# EAGLE board Longboard (EAGLE 9.1.3), part 1 of 2
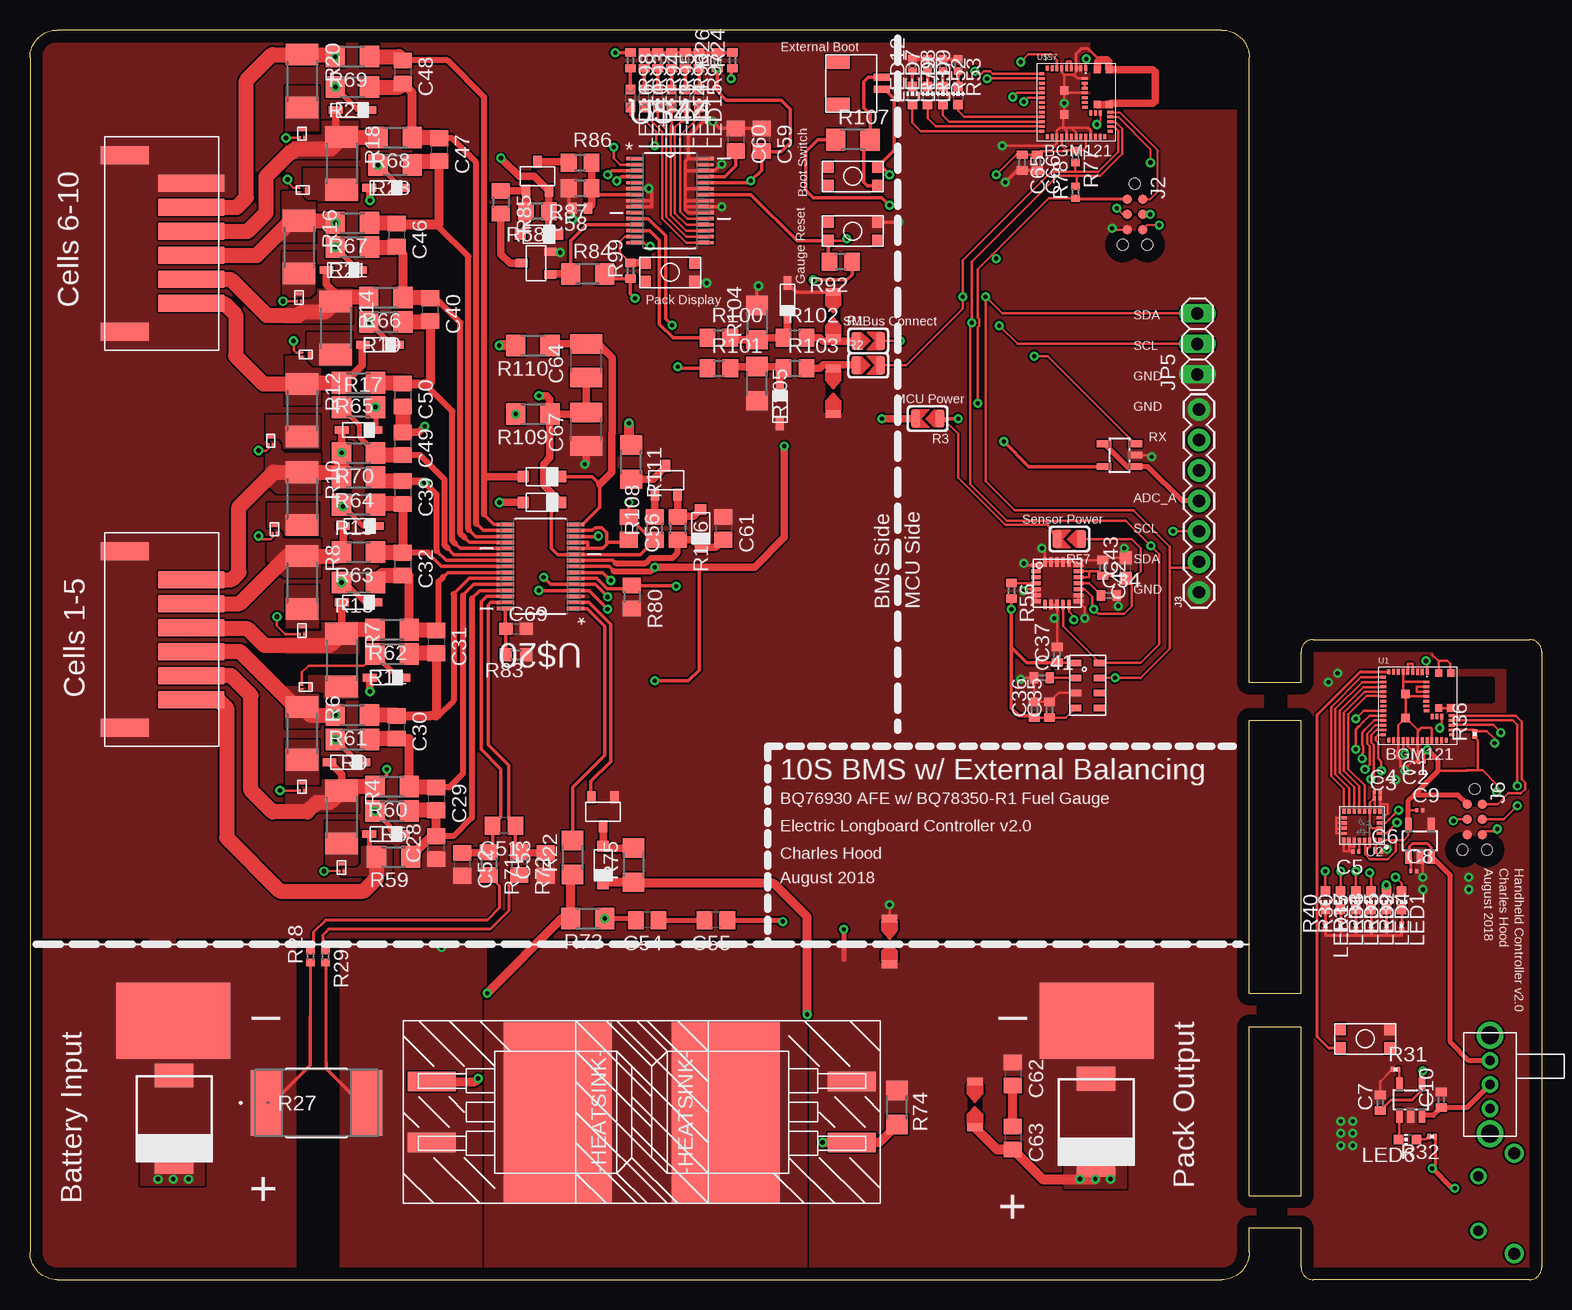
[diagram p0: board, top side]
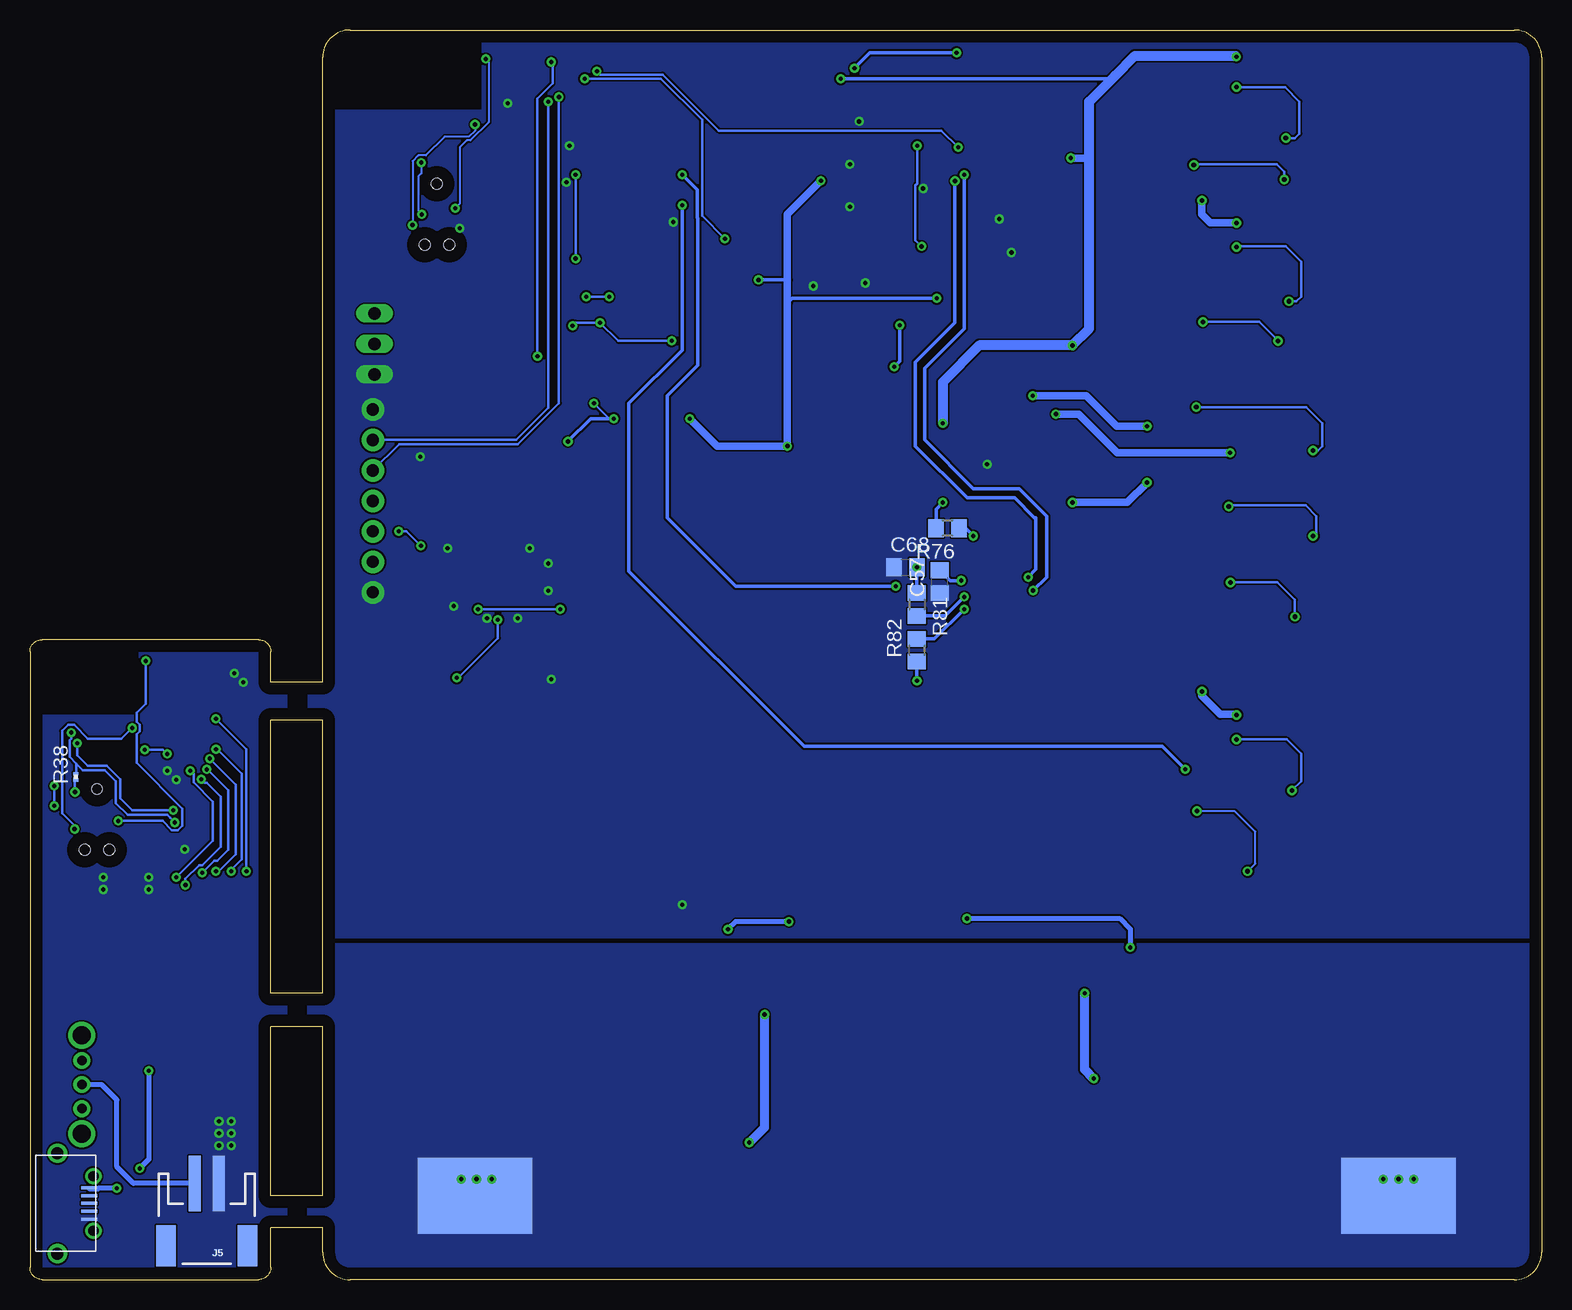
[diagram p1: board, bottom side, seen from below]

Size 125.98 x 104.14 mm. Coordinates in mm from the lower left corner, seen from the top.
Outline: 2.29,0 99.31,0 arc90 101.6,2.29 101.6,4.32 105.92,4.32 105.92,1.02 arc90 106.93,0 124.97,0 arc90 125.98,1.02 125.98,52.32 arc90 124.97,53.34 106.93,53.34 arc90 105.92,52.32 105.92,49.78 101.6,49.78 101.6,101.85 arc90 99.31,104.14 2.29,104.14 arc90 0,101.85 0,2.29 arc90 2.29,0
Outline: 101.6,6.99 101.6,21.08 105.92,21.08 105.92,6.99 101.6,6.99
Outline: 101.6,23.88 101.6,46.61 105.92,46.61 105.92,23.88 101.6,23.88
Copper layers (1*16): Top 0.035mm / dielectric 1.5mm / Bottom 0.035mm
Design rules "default": minimum track width 6mil, minimum drill 0.35mm, track to track 6mil, track to pad 6mil, pad to pad 6mil, via to via 6mil, smd to smd 6mil, copper to edge 40mil, drill to drill 6mil, minimum pad ring 10mil, minimum via ring 8mil, stop-mask expansion 4mil, vias tented up to drill 0mil, thermal gap 10mil
Net classes: 0 default: width 0.152 mm, drill 0.305 mm, clearance 0.152 mm; 1 power: width 0.203 mm, drill 0.305 mm, clearance 0.152 mm
tRestrict: area 88.4,97.5 to 101.6,105.4; area 113.3,45.2 to 117.3,50.3
bRestrict: area 88.4,97.5 to 102.4,105.2

## Footprints (pad centres in the part's own frame; a part is rotated, then mirrored left to right if it is on the bottom)
C0201 = smd 0.25 x 0.35: 1 -0.25,0; 2 0.25,0
C0402 = smd 0.7 x 0.9: 1 -0.65,0; 2 0.65,0
C0805 = smd 1.3 x 1.5: 1 -0.95,0; 2 0.95,0
C0603 = smd 1.1 x 1: 1 -0.85,0; 2 0.85,0
C1210 = smd 1.6 x 2.7: 1 -1.4,0; 2 1.4,0
JST_2PIN_SH = smd 0.6 x 1.35: 1 -0.5,2.135; 2 0.5,2.135 | smd 1.2 x 2: A1 -1.8,-1.54; A2 1.8,-1.54
TC2030-MCP-NL = smd 0.787 x 0.787: 1 1.27,-0.635; 2 1.27,0.635; 3 2.54,-0.635; 4 2.54,0.635; 5 3.81,-0.635; 6 3.81,0.635 | hole 0.889: 0,0; 5.08,-1.016; 5.08,1.016
1X07 = drill 1.016 pad 1.88: 1 0,0; 2 2.54,0; 3 5.08,0; 4 7.62,0; 5 10.16,0; 6 12.7,0; 7 15.24,0
MOLEX_USB = smd 0.25 x 1.35: P$1 -1.3,2.65; P$2 -0.65,2.65; P$3 0,2.65; P$4 0.65,2.65; P$5 1.3,2.65 | drill 0.85 pad 1.206: P$6 -2.276,3; P$7 2.276,3 | drill 1 pad 1.6: P$8 -4.175,0; P$9 4.175,0
JST-2-SMD = smd 1 x 4.6: 1 -1,-3.7; 2 1,-3.7 | smd 1.6 x 3.4: NC1 -3.4,1.5; NC2 3.4,1.5
1X03 = drill 1.016 long: 1 -2.54,0; 2 0,0; 3 2.54,0
CHIP-LED0603 = smd 0.8 x 0.8: A 0,-0.75; C 0,0.75
CHIPLED_0603 = smd 0.8 x 0.8: A 0,-0.75; C 0,0.75
3-XFDFN = smd 0.5 x 0.25: P$1 0,0.325 | smd 0.15 x 0.25: P$2 -0.175,-0.325; P$3 0.175,-0.325
SOLDERJUMPER_ARROW_NOPASTE = smd 0.762 x 1.524: 1 -1.016,0; 2 1.016,0
R2010 = smd 1.8 x 2.7: 1 -2.2,0; 2 2.2,0
R1206 = smd 1.6 x 1.803: 1 -1.422,0; 2 1.422,0
R0402 = smd 0.7 x 0.9: 1 -0.65,0; 2 0.65,0
W-3921 = smd 2.642 x 5.461: 1 -4.166,0; 2 4.166,0
R0402' = smd 0.6 x 0.7: 1 -0.5,0; 2 0.5,0
R0201 = smd 0.28 x 0.43: 1 -0.255,0; 2 0.255,0
R0805 = smd 1.3 x 1.5: 1 -0.95,0; 2 0.95,0
R0603 = smd 1 x 1.1: 1 -0.85,0; 2 0.85,0
KMR731NG = smd 0.9 x 1: P$1 -2.05,0.8; P$2 2.05,0.8; P$3 2.05,-0.8; P$4 -2.05,-0.8
BGM121_PAC = smd 0.245 x 0.5: P$1 3.65,5.7; P$2 3.25,5.7; P$3 2.85,5.7; P$4 2.45,5.7; P$5 2.05,5.7; P$6 1.65,5.7; P$7 1.25,5.7; P$8 0.85,5.7; P$24 0.85,0; P$25 1.25,0; P$26 1.65,0; P$27 2.05,0; P$28 2.45,0; P$29 2.85,0; P$30 3.25,0; P$31 3.65,0; P$32 4.05,0; P$33 4.45,0; P$34 4.85,0 | smd 0.245 x 0.425: P$9 0.45,5.7; P$23 0.45,0; P$35 5.25,0 | smd 0.425 x 0.245: P$10 0,5.25; P$22 0,0.45; P$36 5.7,0.45 | smd 0.5 x 0.245: P$11 0,4.85; P$12 0,4.45; P$13 0,4.05; P$14 0,3.65; P$15 0,3.25; P$16 0,2.85; P$17 0,2.45; P$18 0,2.05; P$19 0,1.65; P$20 0,1.25; P$21 0,0.85; P$37 5.7,0.85; P$38 5.7,1.25; P$39 5.7,1.65; P$40 5.7,2.05; P$45 3.585,2.85; P$46 3.585,3.25; P$47 3.585,3.65; P$48 3.585,4.05; P$49 3.585,4.45; P$50 3.585,4.85 | smd 0.245 x 0.45: P$41 4.865,1.98; P$42 4.465,1.98; P$43 4.065,1.98 | smd 0.45 x 0.245: P$44 3.585,2.45 | smd 0.67 x 0.67: P$51 1.85,3.85; P$52 1.85,1.85 | smd 0.6 x 0.6: P$53 5.615,5.6; P$54 4.615,5.6; P$55 4.615,2.68; P$56 5.615,2.68
LGA24-8X4 = smd 0.27 x 0.45: 1 -1.505,1.225; 6 -1.505,-1.225; 7 -1.075,-1.225; 8 -0.645,-1.225; 9 -0.215,-1.225; 10 0.215,-1.225; 11 0.645,-1.225; 12 1.075,-1.225; 13 1.505,-1.225; 18 1.505,1.225; 19 1.075,1.225; 20 0.645,1.225; 21 0.215,1.225; 22 -0.215,1.225; 23 -0.645,1.225; 24 -1.075,1.225 | smd 0.45 x 0.27: 2 -1.475,0.645; 3 -1.475,0.215; 4 -1.475,-0.215; 5 -1.475,-0.645; 14 1.475,-0.645; 15 1.475,-0.215; 16 1.475,0.215; 17 1.475,0.645
SOT23-5L = smd 0.55 x 1.2: 1 -0.95,-1.3; 2 0,-1.3; 3 0.95,-1.3; 4 0.95,1.3; 5 -0.95,1.3
SPDT_THRU = drill 0.787 pad 1.397: 1 -2.007,0; 2 0,0; 3 2.007,0 | drill 1.499: A1 -4.102,0; A2 4.102,0
SOD-323F = smd 0.65 x 1.15: 1 0,1.4; 2 0,-1.4
PAD = smd 9.525 x 6.35: P$1 0,0
JST_6PIN = smd 1.4 x 5.5: 1 -5,-2.775; 2 -3,-2.775; 3 -1,-2.775; 4 1,-2.775; 5 3,-2.775; 6 5,-2.775 | smd 1.5 x 4: A1 -7.35,2.775; A2 7.35,2.775
SOIC-30 = smd 1.473 x 0.279: 1 -2.921,3.505; 2 -2.921,2.997; 3 -2.921,2.489; 4 -2.921,2.007; 5 -2.921,1.499; 6 -2.921,0.991; 7 -2.921,0.508; 8 -2.921,0; 9 -2.921,-0.508; 10 -2.921,-0.991; 11 -2.921,-1.499; 12 -2.921,-2.007; 13 -2.921,-2.489; 14 -2.921,-2.997; 15 -2.921,-3.505; 16 2.921,-3.505; 17 2.921,-2.997; 18 2.921,-2.489; 19 2.921,-2.007; 20 2.921,-1.499; 21 2.921,-0.991; 22 2.921,-0.508; 23 2.921,0; 24 2.921,0.508; 25 2.921,0.991; 26 2.921,1.499; 27 2.921,2.007; 28 2.921,2.489; 29 2.921,2.997; 30 2.921,3.505
SOD-123 = smd 0.9 x 0.95: P$1 -1.575,0; P$2 1.575,0
TO-263 = smd 1.6 x 4: 1 -2.54,-5.25; 2 2.54,-5.25 | smd 15 x 9: 3 0,5.25
MLP3115A2 = smd 0.95 x 0.55: 1 -1,1.875; 2 -1,0.625; 3 -1,-0.625; 4 -1,-1.875; 5 1,-1.875; 6 1,-0.625; 7 1,0.625; 8 1,1.875
FXAS21002 = smd 0.8 x 0.3: 1 -1.775,1.5; 2 -1.775,1; 3 -1.775,0.5; 4 -1.775,0; 5 -1.775,-0.5; 6 -1.775,-1; 7 -1.775,-1.5; 13 1.775,-1.5; 14 1.775,-1; 15 1.775,-0.5; 16 1.775,0; 17 1.775,0.5; 18 1.775,1; 19 1.775,1.5 | smd 0.3 x 0.8: 8 -1,-1.775; 9 -0.5,-1.775; 10 0,-1.775; 11 0.5,-1.775; 12 1,-1.775; 20 1,1.775; 21 0.5,1.775; 22 0,1.775; 23 -0.5,1.775; 24 -1,1.775
SOT23-3 = smd 0.7 x 1: 1 -0.95,-1.2; 2 0.95,-1.2; 3 0,1.2
SPARK_GAP = smd 1.27 x 0.635: P$1 0,1.905; P$2 0,-1.905
SMC(DO-214AB) = smd 1.96 x 3.2: 1 -3.6,0; 2 3.6,0

## Placement (x,y rotation side)
C1  0.1uF  [C0201]  115.95,43.94 180 top
C2  1uF  [C0201]  115.95,43.18 180 top
C3  0.1uF  [C0201]  112.27,40.13 0 top
C4  0.1uF  [C0201]  112.27,40.64 0 top
C5  0.01uF  [C0201]  110.49,35.69 180 top
C6  0.1uF  [C0201]  112.39,35.69 0 top
C7  4.7uF  [C0402]  112.52,14.73 90 top
C8  1uF  [C0201]  115.32,34.04 0 top
C9  1uF  [C0201]  115.82,39.12 0 top
C10  4.7uF  [C0402]  117.6,14.99 90 top
C28  0.22uF  [C0805]  33.85,36 90 top
C29  0.22uF  [C0805]  33.85,40.07 270 top
C30  0.22uF  [C0805]  30.54,46.04 270 top
C31  0.22uF  [C0805]  33.85,53.15 270 top
C32  0.22uF  [C0805]  31.05,59.63 270 top
C34  0.1uF  [C0402]  89.92,57.02 0 top
C35  1uF  [C0402]  84.96,47.5 90 top
C36  100nF  [C0402]  83.69,47.5 90 top
C37  0.1uF  [C0402]  85.6,52.07 90 top
C39  0.22uF  [C0805]  31.05,65.6 270 top
C40  0.22uF  [C0805]  33.34,80.84 270 top
C41  1uF  [C0402]  84.33,50.16 0 top
C42  1uF  [C0402]  89.41,59.31 270 top
C43  10uF  [C0603]  91.31,59.31 90 top
C46  0.22uF  [C0805]  30.54,87.06 270 top
C47  0.22uF  [C0805]  34.1,94.17 270 top
C48  0.22uF  [C0805]  31.05,100.65 270 top
C49  0.22uF  [C0805]  31.05,69.66 270 top
C50  0.22uF  [C0805]  31.05,73.72 270 top
C51  0.1uF  [C0805]  39.5,37.85 180 top
C52  0.1uF  [C0805]  36,34.61 270 top
C53  0.1uF  [C0805]  42.99,34.61 90 top
C54  0.1uF  [C0805]  51.44,29.97 180 top
C55  0.1uF  [C0805]  57.15,29.97 180 top
C56  1uF  [C0805]  49.91,62.61 270 top
C57  1uF  [C0805]  50.16,58.17 90 bottom
C58  3300pF  [C0402]  45.85,89.28 180 top
C59  0.1uF  [C0805]  60.96,95 270 top
C60  0.1uF  [C0805]  58.8,95 270 top
C61  1uF  [C0805]  57.79,62.61 270 top
C62  0.1uF  [C0805]  81.91,17.14 270 top
C63  0.1uF  [C0805]  81.91,11.81 270 top
C64  10uF  [C1210]  46.36,76.58 90 top
C65  1uF  [C0402]  82.68,93.09 270 top
C66  0.1uF  [C0402]  83.95,93.09 270 top
C67  10uF  [C1210]  46.36,70.87 90 top
C68  4.7uF  [C0805]  53.02,59.37 0 bottom
C69  500pF  [C0603]  40.51,54.23 0 top
J1  JST_2PIN_SH  [JST_2PIN_SH]  68.83,99.7 270 top
J2  [TC2030-MCP-NL]  92.07,91.31 270 top
J3  [1X07]  97.41,57.28 90 top
J4  MICRO_USB  [MOLEX_USB]  123.7,6.35 270 bottom
J5  [JST-2-SMD]  111.25,4.32 180 bottom
J6  [TC2030-MCP-NL]  120.4,40.89 270 top
JP5  [1X03]  97.28,77.98 90 top
LED1  [CHIP-LED0603]  114.3,31.62 180 top
LED2  [CHIP-LED0603]  111.76,31.62 180 top
LED3  [CHIP-LED0603]  109.22,31.62 180 top
LED4  [CHIP-LED0603]  113.03,31.62 180 top
LED5  [CHIP-LED0603]  110.49,31.62 180 top
LED6  [CHIP-LED0603]  114.81,11.68 90 top
LED7  [CHIP-LED0603]  74.8,98.68 0 top
LED8  [CHIP-LED0603]  76.07,98.68 0 top
LED9  [CHIP-LED0603]  77.34,98.68 0 top
LED10  [CHIPLED_0603]  51.18,98.43 180 top
LED11  [CHIPLED_0603]  52.32,98.43 180 top
LED12  [CHIP-LED0603]  73.53,98.68 0 top
LED13  [CHIPLED_0603]  53.47,98.43 180 top
LED14  [CHIPLED_0603]  54.61,98.43 180 top
LED15  [CHIPLED_0603]  55.75,98.43 180 top
LED16  [CHIPLED_0603]  50.04,98.43 180 top
LED17  [CHIP-LED0603]  107.95,31.62 180 top
Q1  CSD13381F4  [3-XFDFN]  25.97,34.35 0 top
Q3  CSD13381F4  [3-XFDFN]  22.67,41.08 0 top
Q4  CSD13381F4  [3-XFDFN]  22.99,49.4 270 top
Q5  CSD13381F4  [3-XFDFN]  22.67,54.1 0 top
Q6  CSD13381F4  [3-XFDFN]  20.38,62.55 0 top
Q7  CSD13381F4  [3-XFDFN]  20.07,69.91 0 top
Q8  CSD13381F4  [3-XFDFN]  22.99,77.09 270 top
Q9  CSD13381F4  [3-XFDFN]  22.42,81.85 0 top
Q10  CSD13381F4  [3-XFDFN]  22.73,90.81 270 top
Q11  CSD13381F4  [3-XFDFN]  22.67,95.5 0 top
R1  dnp  [SOLDERJUMPER_ARROW_NOPASTE]  69.85,78.23 0 top
R2  dnp  [SOLDERJUMPER_ARROW_NOPASTE]  69.85,76.2 0 top
R3  dnp  [SOLDERJUMPER_ARROW_NOPASTE]  74.8,71.76 180 top
R4  28.7  [R2010]  25.97,38.54 270 top
R5  10k  [R1206]  30.17,39.05 180 top
R6  28.7  [R2010]  22.67,45.53 270 top
R7  28.7  [R2010]  25.97,51.63 270 top
R8  28.7  [R2010]  22.67,58.1 270 top
R9  10k  [R1206]  26.87,45.02 180 top
R10  28.7  [R2010]  22.67,65.09 270 top
R11  10k  [R1206]  30.17,52.13 180 top
R12  28.7  [R2010]  22.67,72.45 270 top
R13  10k  [R1206]  27.38,58.1 180 top
R14  28.7  [R2010]  25.46,79.31 270 top
R15  10k  [R1206]  27.38,64.58 180 top
R16  28.7  [R2010]  22.42,86.04 270 top
R17  10k  [R1206]  27.38,72.71 0 top
R18  28.7  [R2010]  25.97,93.03 270 top
R19  10k  [R1206]  29.66,79.82 180 top
R20  28.7  [R2010]  22.67,99.89 270 top
R21  10k  [R1206]  26.87,86.04 180 top
R22  0  [R1206]  45.21,35.18 90 top
R23  10k  [R1206]  30.42,92.9 180 top
R24  dnp  [R0402]  58.55,101.6 90 top
R25  10k  [R1206]  26.87,99.38 180 top
R26  dnp  [R0402]  57.28,101.6 90 top
R27  WSLP39211L000FEB  [W-3921]  23.88,14.73 0 top
R28  0  [R0402']  23.37,26.92 90 top
R29  0  [R0402']  24.64,26.92 270 top
R30  330  [R0201]  109.22,29.46 90 top
R31  4.7k  [R0201]  113.79,17.53 0 top
R32  4.7k  [R0201]  116.84,11.94 180 top
R33  330  [R0201]  113.03,29.46 90 top
R34  330  [R0201]  111.76,29.46 90 top
R35  330  [R0201]  110.49,29.46 90 top
R36  4.7k  [R0201]  120.4,45.47 90 top
R37  330  [R0402']  74.8,101.22 270 top
R38  4.7k  [R0201]  122.17,41.91 90 bottom
R39  330  [R0201]  114.3,29.46 90 top
R40  330  [R0201]  107.95,29.46 90 top
R52  330  [R0402']  76.07,101.22 270 top
R53  330  [R0402']  77.34,101.22 270 top
R56  47k  [R0402]  81.79,57.4 270 top
R57  dnp  [SOLDERJUMPER_ARROW_NOPASTE]  86.61,61.72 180 top
R58  100k  [R0805]  42.29,89.03 180 top
R59  1k  [R1206]  30.3,35.24 180 top
R60  1k  [R1206]  30.17,41.08 180 top
R61  1k  [R1206]  26.87,47.05 180 top
R62  1k  [R1206]  30.17,54.17 180 top
R63  1k  [R1206]  27.38,60.64 180 top
R64  1k  [R1206]  27.38,66.87 180 top
R65  1k  [R1206]  27.38,74.74 180 top
R66  1k  [R1206]  29.66,81.85 180 top
R67  1k  [R1206]  26.87,88.07 180 top
R68  1k  [R1206]  30.42,95.19 180 top
R69  1k  [R1206]  26.87,101.92 180 top
R70  1k  [R1206]  27.38,68.9 180 top
R71  100  [R0805]  38.23,34.67 270 top
R72  100  [R0805]  40.77,34.67 270 top
R73  1M  [R1206]  46.48,30.1 180 top
R74  1M  [R1206]  72.26,14.35 270 top
R75  1M  [R1206]  50.29,34.54 90 top
R76  10k  [R0805]  49.53,62.61 180 bottom
R77  4.7k  [R0402']  87.12,93.6 270 top
R78  4.7k  [R0402']  87.12,90.61 90 top
R79  330  [R0402']  73.53,101.22 270 top
R80  10k  [R0805]  50.16,56.9 270 top
R81  10k  [R0805]  52.07,56.26 270 bottom
R82  10k  [R0805]  52.07,52.45 90 bottom
R83  499k  [R0603]  40.51,52.07 180 top
R84  1M  [R1206]  46.48,83.82 0 top
R85  100k  [R0805]  39.24,89.79 270 top
R86  300k  [R0805]  45.85,93.09 0 top
R87  13.7k  [R0805]  45.85,90.93 180 top
R92  100k  [R0805]  67.56,84.84 180 top
R93  330  [R0402]  51.18,101.6 270 top
R94  330  [R0402]  52.32,101.6 270 top
R95  330  [R0402]  53.47,101.6 270 top
R96  330  [R0402]  54.61,101.6 270 top
R97  330  [R0402]  55.75,101.6 270 top
R98  330  [R0402]  50.04,101.6 270 top
R99  100k  [R0402]  50.04,84.07 90 top
R100  100  [R0805]  57.4,78.49 0 top
R101  100  [R0805]  57.4,75.95 0 top
R102  100  [R0805]  63.75,78.49 0 top
R103  100  [R0805]  63.75,75.95 0 top
R104  1M  [R1206]  60.58,79.76 90 top
R105  1M  [R1206]  60.58,74.68 270 top
R106  100k  [R0805]  53.98,62.61 270 top
R107  3.01k  [R1206]  68.58,95 0 top
R108  100k  [R0805]  52.07,62.61 90 top
R109  1k  [R1206]  41.91,72.14 180 top
R110  1k  [R1206]  41.91,77.85 180 top
R111  200  [R1206]  50.1,68.14 270 top
S1  KMR731NG  [KMR731NG]  68.58,91.95 0 top
S2  KMR731NG  [KMR731NG]  53.34,83.95 0 top
S3  KMR731NG  [KMR731NG]  68.58,87.38 0 top
S4  KMR731NG  [KMR731NG]  111.25,20.07 180 top
U1  BGM121_DEV  [BGM121_PAC]  112.78,44.96 0 top
U2  LSM9DS1  [LGA24-8X4]  111,37.85 180 top
U3  TPS782XX  [SOT23-5L]  115.82,36.58 0 top
U4  MCP73831  [SOT23-5L]  115.06,14.99 0 top
U$1  SPDT_THRU  [SPDT_THRU]  121.67,16.26 90 top
U$3  MMSZ5232BS-7-F  [SOD-323F]  26.36,43.12 90 top
U$4  MMSZ5232BS-7-F  [SOD-323F]  29.72,50.16 90 top
U$5  MCP6001  [SOT23-5L]  90.8,68.71 90 top
U$6  MMSZ5232BS-7-F  [SOD-323F]  29.66,37.15 90 top
U$7  MMSZ5232BS-7-F  [SOD-323F]  27.38,56.45 90 top
U$8  MMSZ5232BS-7-F  [SOD-323F]  27.49,62.8 90 top
U$9  MMSZ5232BS-7-F  [SOD-323F]  27.38,70.8 90 top
U$10  MMSZ5232BS-7-F  [SOD-323F]  29.15,77.91 90 top
U$11  MMSZ5232BS-7-F  [SOD-323F]  26.11,84.14 90 top
U$12  MMSZ5232BS-7-F  [SOD-323F]  29.66,91 90 top
U$13  MMSZ5232BS-7-F  [SOD-323F]  26.87,97.47 90 top
U$14  PAD  [PAD]  88.9,21.59 180 top
U$15  PAD  [PAD]  88.9,6.99 0 bottom
U$16  PAD  [PAD]  11.94,6.99 0 bottom
U$17  PAD  [PAD]  11.94,21.59 0 top
U$18  JST_6PIN  [JST_6PIN]  10.67,86.36 90 top
U$19  JST_6PIN  [JST_6PIN]  10.67,53.34 90 top
U$20  BQ76930  [SOIC-30]  42.55,59.44 180 top
U$21  1N4148W-7-F  [SOD-123]  42.67,64.77 0 top
U$22  AOB290L  [TO-263]  38.73,13.97 270 top
U$23  AOB290L  [TO-263]  63.25,13.97 90 top
U$25  MLP3115A2  [MLP3115A2]  88.14,49.53 0 top
U$34  FXAS21002  [FXAS21002]  85.6,58.04 0 top
U$40  1N4148W-7-F  [SOD-123]  47.75,34.54 270 top
U$41  BSS84PH6433XTMA1  [SOT23-3]  47.75,38.99 180 top
U$43  1N4148W-7-F  [SOD-123]  42.67,66.93 0 top
U$44  BQ78350-R1  [SOIC-30]  53.34,89.92 0 top
U$45  NTR5105PT1G  [SOT23-3]  42.29,91.95 0 top
U$46  BSS138  [SOT23-3]  42.16,84.71 90 top
U$47  MMSZ5246B-7-F  [SOD-123]  42.42,87.12 0 top
U$50  MMSZ5232BS-7-F  [SOD-323F]  63.12,81.66 0 top
U$51  MMSZ5232BS-7-F  [SOD-323F]  62.48,72.77 180 top
U$52  SPARK_GAP  [SPARK_GAP]  66.93,74.04 180 top
U$53  SPARK_GAP  [SPARK_GAP]  66.93,80.39 0 top
U$54  BST82  [SOT23-3]  53.02,66.61 0 top
U$55  1N4148W-7-F  [SOD-123]  55.88,62.61 270 top
U$56  SPARK_GAP  [SPARK_GAP]  78.74,14.61 180 top
U$57  BGM121_DEV  [BGM121_PAC]  84.33,95.25 0 top
U$58  MURS360T3G  [SMC(DO-214AB)]  88.84,13.14 270 top
U$59  SPARK_GAP  [SPARK_GAP]  71.63,28.19 180 top
U$60  SMCJ75A  [SMC(DO-214AB)]  12,13.4 270 top

## Library data of the parts
C1-C10 C65 C66 = rcl; SPICEPREFIX: C
C28-C32 C34-C37 C39-C43 C46-C64 C67-C69 R5 R9 R11 R13 R15 R17 R19 R21-R26 R56 R58-R76 R80-R87 R92-R111 = rcl
J1 J4 U3 U4 U$1 U$5 U$18 U$19 = James_Updated
J2 J6 = Tag-Connect-Footprints
J3 = SparkFun-Connectors
J5 = SparkFun-Connectors; PROD_ID: CONN-11443; SF_ID: PRT-08612
JP5 = pinhead
LED1-LED17 = adafruit
Q1 Q3-Q11 S1-S4 U$3 U$4 U$6-U$17 U$20-U$23 U$25 U$34 U$40 U$41 U$43-U$47 U$50-U$56 U$58-U$60 = Charles
R1-R3 R57 = Charles; BOM: EXCLUDE
R4 R6-R8 R10 R12 R14 R16 R18 R20 = resistor
R27 = Charles; MANUFACTURER_PART_NUMBER: WSLP39211L000FEB; VENDOR: Vishay
R28-R40 R52 R53 R77-R79 = rcl; SPICEPREFIX: R
U1 U$57 = BGM121
U2 = Charles; PROD_ID: IC-12536

## Nets
+3V1: C1.1 C2.1 C3.1 C4.1 C9.1 J6.1 R36.1 R38.1 U1.P$26 U1.P$31 U2.1 U2.3 U2.7 U2.8 U2.22 U2.23 U3.5
+3V3: C65.1 C66.1 J2.1 R3.1 R57.2 R77.1 R78.1 U$5.5 U$57.P$26 U$57.P$31
+3V3_SENSOR: C35.1 C36.1 C37.1 C42.2 C43.1 R56.2 R57.1 U$25.1 U$25.4 U$34.15 U$34.17 U$34.18
ACCEL/GYRO_EN: U1.P$10 U2.13
ALERT: C69.1 R83.2 U$20.30
BATT_IN: C10.1 J5.2 U4.3 U$1.2
BOOT: J1.2 R80.1 S1.P$2 U$20.6
CELL0: Q1.P$3 R59.2 U$6.1 U$19.1
CELL1: Q3.P$3 R4.1 R60.2 R107.1 U$3.1 U$19.2
CELL2: Q4.P$3 R6.1 R61.2 U$4.1 U$19.3
CELL3: Q5.P$3 R7.1 R62.2 U$7.1 U$19.4
CELL4: Q6.P$3 R8.1 R63.2 U$8.1 U$19.5
CELL5: Q7.P$3 R10.1 R64.2 R70.2 R109.2 U$9.1 U$19.6
CELL6: Q8.P$3 R12.1 R65.2 U$10.1 U$18.1
CELL7: Q9.P$3 R14.1 R66.2 U$11.1 U$18.2
CELL8: Q10.P$3 R16.1 R67.2 U$12.1 U$18.3
CELL9: Q11.P$3 R18.1 R68.2 U$13.1 U$18.4
CELL10: R20.1 R24.1 R58.1 R69.2 R110.2 R111.1 U$18.5 U$45.2 U$47.P$2
DBG_RESET: J2.3 U$57.P$1
DBG_RESET1: J6.3 U1.P$1
DBG_TCK_SWCLK: J2.4 U$57.P$39
DBG_TCK_SWCLK1: J6.4 U1.P$39
DBG_TDI_SWDIO: J2.2 U$57.P$40
DBG_TDI_SWDIO1: J6.2 U1.P$40
DBG_TDI_SWO: J2.6 U$57.P$41
DBG_TDI_SWO1: J6.6 U1.P$41
GAUGE_IRQ: U$44.2 U$57.P$10
GAUGE_RESET: R92.2 S3.P$4 U$44.24 U$57.P$11
GAUGE_SCL: R81.2 U$20.5 U$44.4
GAUGE_SDA: R82.2 U$20.4 U$44.3
GND: C28.1 C34.2 C35.2 C36.2 C37.2 C41.1 C42.1 C43.2 C52.2 C53.1 C57.1 C58.2 C59.1 C60.1 C61.1 C65.2 C66.2 C67.1 C68.1 C69.2 J2.5 J3.1 J3.7 JP5.1 R27.1 R28.1 R37.1 R52.1 R53.1 R79.1 R80.2 R83.1 R87.2 R104.2 R105.2 S2.P$3 S3.P$2 U$5.2 U$17.P$1 U$18.6 U$18.A1 U$18.A2 U$19.A1 U$19.A2 U$20.3 U$25.3 U$34.1 U$34.5 U$34.6 U$34.7 U$34.9 U$34.10 U$34.13 U$34.14 U$34.19 U$34.20 U$34.21 U$34.22 U$34.23 U$34.24 U$41.1 U$44.6 U$44.8 U$44.9 U$44.21 U$44.22 U$44.23 U$44.25 U$44.28 U$44.30 U$46.2 U$50.1 U$51.1 U$52.P$1 U$53.P$1 U$57.P$2 U$57.P$3 U$57.P$6 U$57.P$25 U$57.P$27 U$57.P$29 U$57.P$32 U$57.P$47 U$57.P$50 U$57.P$51 U$57.P$52 U$57.P$53 U$57.P$54 U$57.P$55 U$57.P$56 U$59.P$2 U$60.1
GND1: C1.2 C2.2 C3.2 C4.2 C5.2 C6.2 C7.2 C8.2 C9.2 C10.2 J4.P$5 J5.1 J6.5 R30.1 R31.1 R33.1 R34.1 R35.1 R39.1 R40.1 S4.P$4 U1.P$2 U1.P$3 U1.P$6 U1.P$25 U1.P$27 U1.P$29 U1.P$32 U1.P$47 U1.P$50 U1.P$51 U1.P$52 U1.P$53 U1.P$54 U1.P$55 U1.P$56 U2.5 U2.6 U2.14 U2.15 U2.16 U2.17 U2.18 U2.19 U2.20 U3.2 U3.4 U4.2
IRQ1: U1.P$12 U2.11
IRQ2: U1.P$11 U2.12
IRQ3: U1.P$14 U2.9
IRQ4: U1.P$13 U2.10
MCU_DAC_OUT: U$5.3 U$57.P$7
N$1: LED12.A U$57.P$22
N$2: LED7.A U$57.P$21
N$3: LED8.A U$57.P$20
N$4: LED9.A U$57.P$19
N$5: R28.2 R71.2
N$6: R29.1 R72.2
N$7: Q1.P$1 R4.2
N$8: Q8.P$2 R19.2 U$10.2
N$9: Q1.P$2 R5.2 U$6.2
N$10: Q3.P$1 R6.2
N$11: Q3.P$2 R9.2 U$3.2
N$12: R22.2 U$20.1
N$13: U$34.8
N$14: Q5.P$1 R8.2
N$15: Q4.P$1 R7.2
N$16: Q4.P$2 R11.2 U$4.2
N$17: Q5.P$2 R13.2 U$7.2
N$18: Q6.P$2 R15.2 U$8.2
N$19: Q8.P$1 R14.2
N$20: C40.2 C50.1 R19.1 R65.1 U$20.20
N$21: C49.2 R17.1 R70.1 U$20.21
N$22: R24.2 R26.2 R93.1 R94.1 R95.1 R96.1 R97.1
N$23: Q6.P$1 R10.2
N$24: LED1.C R39.2
N$25: LED4.C R33.2
N$26: Q7.P$1 R12.2
N$27: Q7.P$2 R17.2 U$9.2
N$28: Q9.P$1 R16.2
N$29: LED2.C R34.2
N$30: R56.1 U$34.4
N$31: LED5.C R35.2
N$32: Q10.P$1 R18.2
N$33: Q11.P$1 R20.2
N$34: Q11.P$2 R25.2 U$13.2
N$35: Q10.P$2 R23.2 U$12.2
N$36: LED7.C R37.2
N$37: Q9.P$2 R21.2 U$11.2
N$38: LED1.A U1.P$22
N$39: LED4.A U1.P$21
N$40: LED2.A U1.P$20
N$41: LED5.A U1.P$19
N$42: LED8.C R52.2
N$43: LED3.C R30.2
N$44: LED3.A U1.P$18
N$45: C5.1 U2.21
N$46: C6.1 U2.24
N$47: C7.1 J4.P$1 R32.1 U4.4
N$48: R31.2 U4.5
N$49: LED6.A R32.2
N$50: LED6.C U4.1
N$51: U1.P$4 U1.P$5
N$52: U1.P$48 U1.P$49
N$53: S4.P$2 U1.P$9
N$54: LED17.C R40.2
N$55: LED17.A U1.P$17
N$74: LED9.C R53.2
N$75: C29.1 C30.2 R9.1 R60.1 U$20.26
N$76: C30.1 C31.2 R11.1 R61.1 U$20.25
N$77: C31.1 C32.2 R13.1 R62.1 U$20.24
N$78: C34.1 U$34.16
N$79: C32.1 C39.2 R15.1 R63.1 U$20.23
N$80: C39.1 R64.1 U$20.22 U$21.P$1
N$81: C41.2 U$25.2
N$82: C40.1 C46.2 R21.1 R66.1 U$20.19
N$83: C46.1 C47.2 R23.1 R67.1 U$20.18
N$84: C47.1 C48.2 R25.1 R68.1 U$20.17
N$85: C48.1 R69.1 U$20.16 U$43.P$1
N$86: C28.2 C29.2 R5.1 R59.1 U$20.27
N$97: C51.1 C53.2 R72.1 U$20.29
N$98: C51.2 C52.1 R71.1 U$20.28
N$99: C54.2 R27.2 R29.2 R73.1 U$22.2
N$100: U$22.3 U$23.3
N$101: R74.2 R75.1 U$23.1 U$40.P$2
N$102: R75.2 U$40.P$1 U$41.3
N$103: U$20.2 U$41.2
N$104: C54.1 C55.2
N$105: C56.2 U$20.11 U$20.12 U$20.14
N$106: R76.1 U$20.13
N$107: C57.2 U$20.7
N$108: R84.1 U$44.12 U$46.1
N$109: R85.2 U$46.3
N$110: U$57.P$4 U$57.P$5
N$112: LED12.C R79.2
N$113: U$57.P$48 U$57.P$49
N$114: R58.2 R85.1 U$45.1 U$47.P$1
N$115: R86.1 U$45.3
N$116: C58.1 R86.2 R87.1 U$44.7
N$122: C60.2 U$44.27
N$124: LED10.A R93.2
N$125: LED11.A R94.2
N$126: LED13.A R95.2
N$127: LED14.A R96.2
N$128: LED15.A R97.2
N$129: LED10.C U$44.16
N$130: LED11.C U$44.17
N$131: LED13.C U$44.18
N$132: LED14.C U$44.19
N$133: LED15.C U$44.20
N$134: LED16.A R98.2
N$135: R99.2 S2.P$1 U$44.14
N$136: LED16.C U$44.15
N$138: R101.1 U$44.11
N$139: R100.1 U$44.13
N$140: R100.2 R102.1 R104.1 U$50.2
N$141: R101.2 R103.1 R105.1 U$51.2
N$142: R106.1 U$54.2 U$55.P$1
N$143: R111.2 U$54.3
N$144: R22.1 R73.2 U$22.1
N$145: J1.1 R107.2 S1.P$3
N$146: C62.2 C63.1
N$147: R108.2 U$54.1
PACK+: C63.2 U$15.P$1 U$16.P$1 U$56.P$1 U$58.2 U$60.2
PACK-: C55.1 C62.1 R74.1 U$14.P$1 U$23.2 U$56.P$2 U$58.1 U$59.P$1
POWER_IN: C8.1 U3.1 U3.3 U$1.3
REGOUT: C59.2 C68.2 R3.2 R26.1 R81.1 R82.1 R84.2 R92.1 R98.1 R99.1 U$20.8 U$44.26
REGSRC: C61.2 R106.2 U$20.9 U$55.P$2
SCL: J3.3 JP5.2 R1.2 R78.2 U$25.8 U$34.11 U$57.P$38
SCL1: R38.2 U1.P$38 U2.2
SDA: J3.2 JP5.3 R2.2 R77.2 U$25.7 U$34.12 U$57.P$37
SDA1: R36.2 U1.P$37 U2.4
SMBC: R1.1 R102.2 U$53.P$2
SMBD: R2.1 R103.2 U$52.P$2
UART_RX: J3.6 U$57.P$15
UART_TX: J3.5 U$57.P$14
V_1V8(28): U$57.P$28
V_1V8(28)1: U1.P$28
VC5X: C49.1 C50.2 C56.1 C64.1 C67.2 R76.2 R108.1 R109.1 U$20.10 U$21.P$2
VC10X: C64.2 R110.1 U$20.15 U$43.P$2
VESC_ADC_CONTROL_A: J3.4 U$5.1 U$5.4